# EAGLE board Acc+Comp+Gyro (EAGLE 7.2.0)
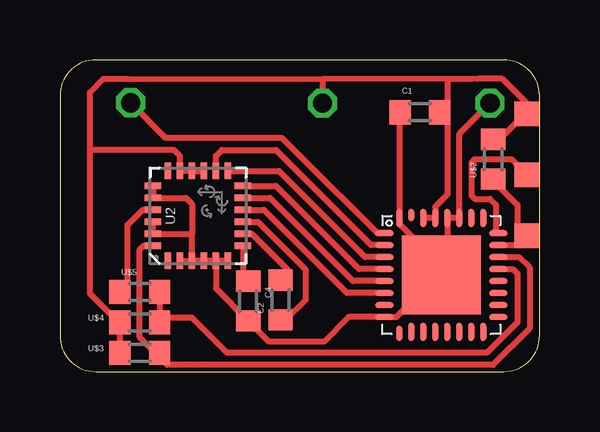
[diagram p0: board, top side]
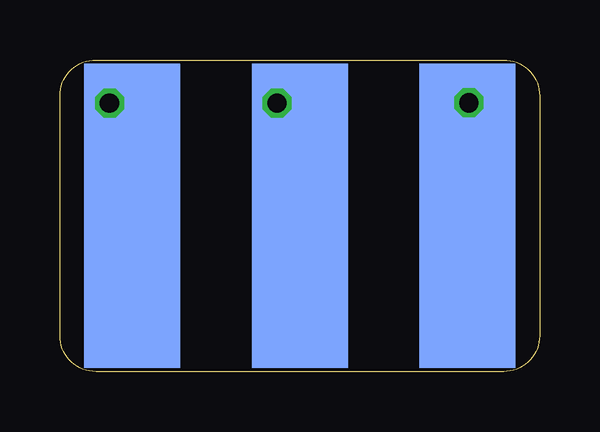
[diagram p1: board, bottom side, seen from below]

Size 20 x 13 mm. Coordinates in mm from the lower left corner, seen from the top.
Copper layers (1*16): Top 0.035mm / dielectric 1.5mm / Bottom 0.035mm
Design rules "Bilex DRU *": minimum track width 10mil, minimum drill 24mil, track to track 10mil, track to pad 10mil, pad to pad 10mil, via to via 10mil, smd to smd 10mil, copper to edge 1mil, drill to drill 8mil, minimum pad ring 10mil, minimum via ring 8mil, stop-mask expansion 4mil, vias tented up to drill 0mil, thermal gap 10mil

## Footprints (pad centres in the part's own frame; a part is rotated, then mirrored left to right if it is on the bottom)
603 = smd 0.889 x 1.016: 1 -0.826,0; 2 0.826,0
LGA-24 = smd 0.7 x 0.29: 1 -1.875,1.25; 2 -1.875,0.75; 3 -1.875,0.25; 4 -1.875,-0.25; 5 -1.875,-0.75; 6 -1.875,-1.25; 13 1.875,-1.25; 14 1.875,-0.75; 15 1.875,-0.25; 16 1.875,0.25; 17 1.875,0.75; 18 1.875,1.25 | smd 0.29 x 0.7: 7 -1.25,-1.875; 8 -0.75,-1.875; 9 -0.25,-1.875; 10 0.25,-1.875; 11 0.75,-1.875; 12 1.25,-1.875; 19 1.25,1.875; 20 0.75,1.875; 21 0.25,1.875; 22 -0.25,1.875; 23 -0.75,1.875; 24 -1.25,1.875
CARRIER_SMD2_3POL = smd 4 x 12.7 bottom: GND -6.985,0; RX/TX 6.985,0; VCC 0,0 | smd 1.016 x 1.016: RST -9.461,0.826; TST -9.461,-1.714; VCC'' -9.461,-4.255
QFN32 = smd 0.762 x 0.254: 1 -2.375,1.75; 2 -2.375,1.25; 3 -2.375,0.75; 4 -2.375,0.25; 5 -2.375,-0.25; 6 -2.375,-0.75; 7 -2.375,-1.25; 8 -2.375,-1.75; 17 2.375,-1.75; 18 2.375,-1.25; 19 2.375,-0.75; 20 2.375,-0.25; 21 2.375,0.25; 22 2.375,0.75; 23 2.375,1.25; 24 2.375,1.75 | smd 0.254 x 0.635: 9 -1.75,-2.438 | smd 0.254 x 0.762: 10 -1.25,-2.375; 11 -0.75,-2.375; 12 -0.25,-2.375; 13 0.25,-2.375; 14 0.75,-2.375; 15 1.25,-2.375; 16 1.75,-2.375; 25 1.75,2.375; 26 1.25,2.375; 27 0.75,2.375; 28 0.25,2.375; 29 -0.25,2.375; 30 -0.75,2.375; 32 -1.75,2.375 | smd 0.254 x 0.508: 31 -1.25,2.5 | smd 3.302 x 3.302: TP 0,0

## Placement (x,y rotation side)
C1  100n  [603]  15.01,10.81 180 top
C2  220n  [603]  9.2,2.98 90 top
C4  4.7µ  [603]  7.85,2.94 270 top
U2  LSM9DS0  [LGA-24]  5.75,6.5 90 top
U$1  CARRIER_SMD2SMD2_3POL  [CARRIER_SMD2_3POL]  10,6.5 180 top
U$2  10k  [603]  18.06,8.86 90 top
U$3  4.7k  [603]  3.33,0.78 0 top
U$4  4.7k  [603]  3.33,2.05 0 top
U$5  0  [603]  3.33,3.32 0 top
U$10  MSP430G2553  [QFN32]  15.9,4.03 0 top

## Library data of the parts
C1 C2 C4 U$1-U$5 U$10 = thar
U2 = SparkFun-DigitalIC

## Nets
GND: C1.2 C4.2 U2.2 U2.3 U2.4 U2.5 U2.6 U2.19 U2.20 U2.22 U2.23 U$1.GND U$10.8 U$10.27 U$10.28 U$10.32 U$10.TP
N$2: U2.24 U$3.2 U$10.22
N$3: U$1.TST U$10.24
N$4: U$1.RST U$2.1 U$10.23
N$5: U$4.2 U$5.2 U$10.21
N$6: C4.1 U2.7
N$7: C2.2 U2.8
N$11: C2.1 U2.9
N$12: U$1.RX/TX U$10.1
N$13: U2.14 U$10.2
N$14: U2.13 U$10.3
N$16: U2.12 U$10.4
N$17: U2.11 U$10.5
N$18: U2.10 U$10.6
N$19: U2.21 U$5.1
VCC: C1.1 U2.15 U2.16 U2.17 U$1.VCC U$1.VCC'' U$2.2 U$3.1 U$4.1 U$10.29 U$10.30

## Tracks (layer width: path | path; a pad name or v marks a point on that pad's centre or on a via)
GND  (via drill 0.8)
  Top 0.254: 16.43,4.35 16.19,5.38 16.16,5.35 | 16.43,4.35 16.48,3.06 U$10.TP 15.01,2.94 14.89,3.14 14.03,2.28 U$10.8 12.03,2.28 11,1.25 8.72,1.25 C4.2 6.5,3.47 U2.5 | 16.15,4.72 U$10.28 U$10.27 16.65,6.99 16.66,7.01 16.66,9.93 v17.93,11.2 | 16.15,4.72 16.15,4.42 16.43,4.35 | 16.15,4.72 15.52,5.35 14.76,5.55 14.15,6.16 U$10.32 14.15,10.81 C1.2 | U2.6 U2.5 | U2.5 U2.4 U2.3 | U2.2 U2.3 | U2.22 U2.23 5.5,5.75 | U2.19 U2.20 5.25,7.25 5.5,7 5.5,5.75 | U2.3 5.5,5.75
  Bottom 0.254: 18,6.5 18,11.13 v17.93,11.2 16.98,11.2 U$1.GND
N$2
  Top 0.254: U$10.22 19.14,4.78 19.59,4.34 19.59,1.8 18.06,0.27 4.47,0.27 3.96,0.78 | 4.47,0.78 U$3.2 3.96,0.78 | 3.96,0.78 3.33,1.42 3.33,5.1 3.48,5.25 U2.24
N$3
  Top 0.254: 19.61,7.88 19.46,8.02 19.5,8.18 U$1.TST | U$10.24 18.19,5.78 18.19,6.95 17.93,7.21 17.3,7.21 17.17,7.33 17.17,8.73 17.3,8.86 18.82,8.86 19.3,8.38 U$1.TST | U$1.TST
N$4
  Top 0.254: 19.46,5.48 19.5,5.38 19.46,5.42 U$1.RST | 19.46,5.48 19.5,5.69 19.08,5.74 19.08,6.95 18.06,7.97 U$2.1 | U$10.23 19.28,5.28 19.46,5.48
N$5
  Top 0.254: U$10.21 18.88,4.28 19.08,4.08 19.08,2.05 17.81,0.78 6.97,0.78 5.5,2.25 4.35,2.25 U$4.2 U$5.2
N$6
  Top 0.254: U2.7 7.62,3.75 C4.1
N$7
  Top 0.254: U2.8 8,5.75 9.5,4.25 9.5,3.86 C2.2
N$11
  Top 0.254: U2.9 8.25,6.25 10.25,4.25 10.25,3 9.4,2.15 C2.1
N$12  (via drill 0.8)
  Top 0.254: U$10.1 13.23,5.78 10.06,8.95 10.05,8.95 9.25,9.75 4.41,9.75 v2.95,11.21
  Bottom 0.254: v2.95,11.21 3.08,6.82 2.89,6.75 2.89,6.63 U$1.RX/TX
N$13
  Top 0.254: U$10.2 12.97,5.28 9,9.25 6.75,9.25 6.5,9 U2.14
N$14
  Top 0.254: U$10.3 12.72,4.78 9.12,8.38 U2.13
N$16
  Top 0.254: U2.12 9,7.75 12.47,4.28 U$10.4
N$17
  Top 0.254: U2.11 8.75,7.25 12.22,3.78 U$10.5
N$18
  Top 0.254: U2.10 8.5,6.75 11.97,3.28 U$10.6
N$19
  Top 0.254: U$5.1 2.82,3.32 2.82,6.12 3.46,6.75 U2.21
VCC  (via drill 0.8)
  Top 0.254: U$10.29 | 16.16,12.21 16.16,10.81 | 16.16,10.81 16.16,7.39 15.65,6.88 U$10.29 | U$10.29 U$10.30 | 19.5,10.52 19.46,10.56 | U$2.2 18.12,9.48 19.2,10.56 19.2,10.51 19.46,10.56 | 19.46,10.56 19.65,10.75 19.65,11.01 18.44,12.21 17.43,12.21 17.17,12.21 16.16,12.21 | 19.46,10.56 U$1.VCC'' | 16.16,12.21 10.95,12.21 | 10.95,12.21 v10.95,11.2 | U$3.1 2.82,0.78 2.82,0.66 U$3.1 | U$3.1 U$4.1 2.5,2 1.25,3.25 1.25,9.25 | 10.95,12.21 2.83,12.21 2.82,12.21 1.81,12.21 1.25,11.66 1.25,9.25 | C1.1 16.16,10.81 | U2.17 U2.16 U2.15 U2.17 | U2.17 5,9 4.75,9.25 1.25,9.25
  Bottom 0.254: U$1.VCC 10,10.25 v10.95,11.2